# Altium PCB SensorFimPapel.PcbDoc
Units mm, origin at the board's own origin, x right, y up, seen from the top; angles counter-clockwise.
Board outline 50 x 25 mm, 2 copper layers (Top Layer, Bottom Layer), stack 1.671 mm thick; 15 components, 5 nets, 25 pads, 4 vias.
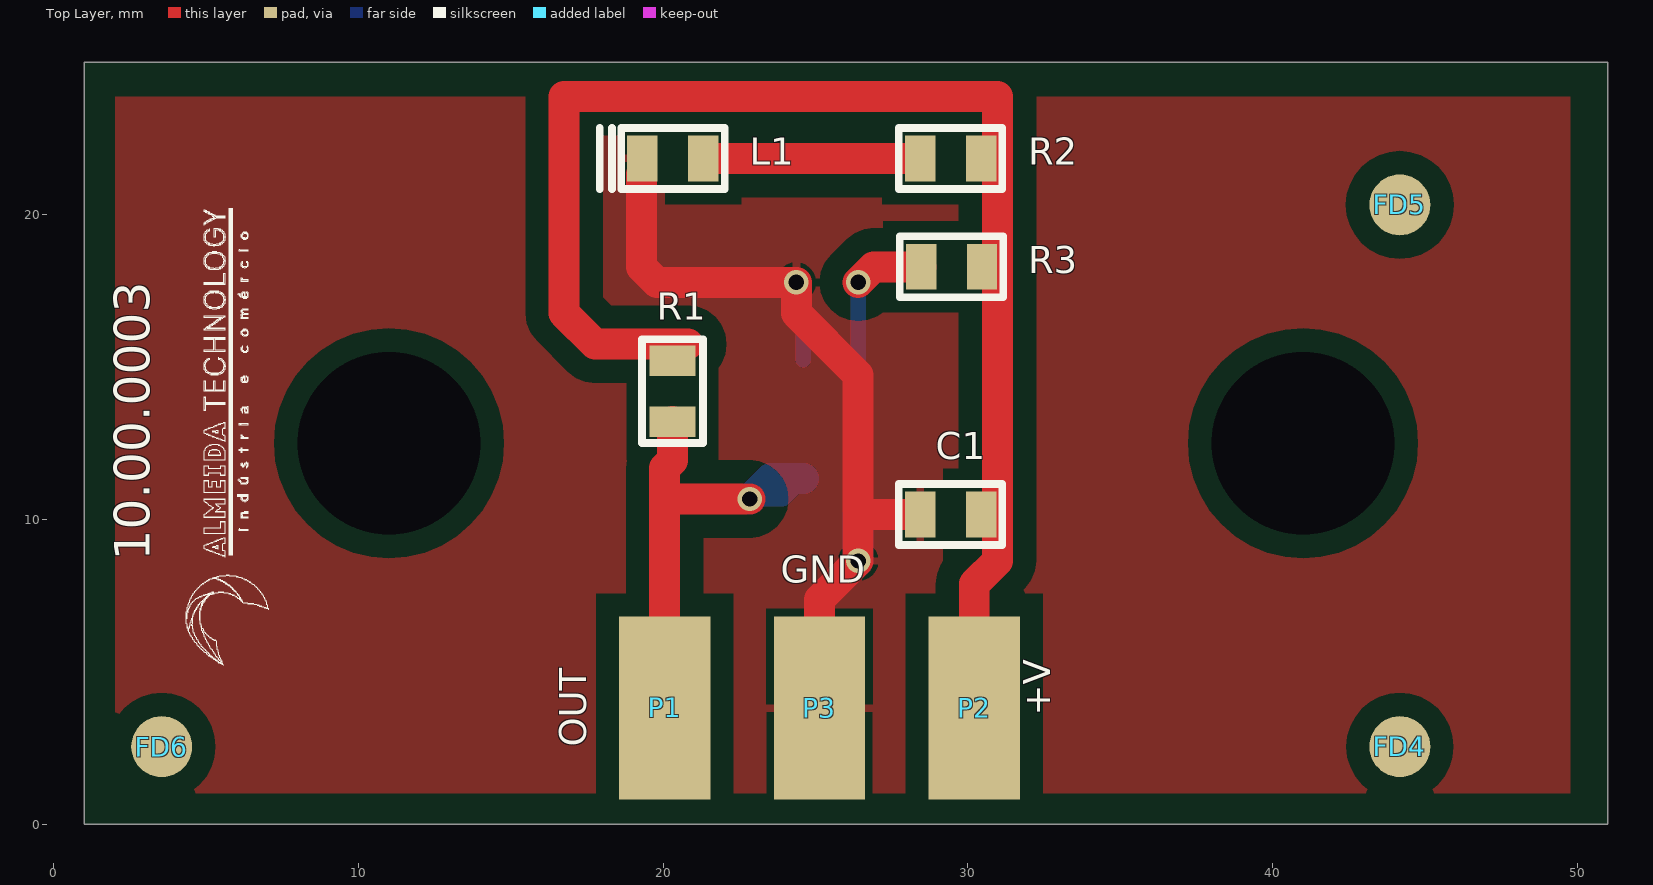
[diagram p0: Top Layer view]
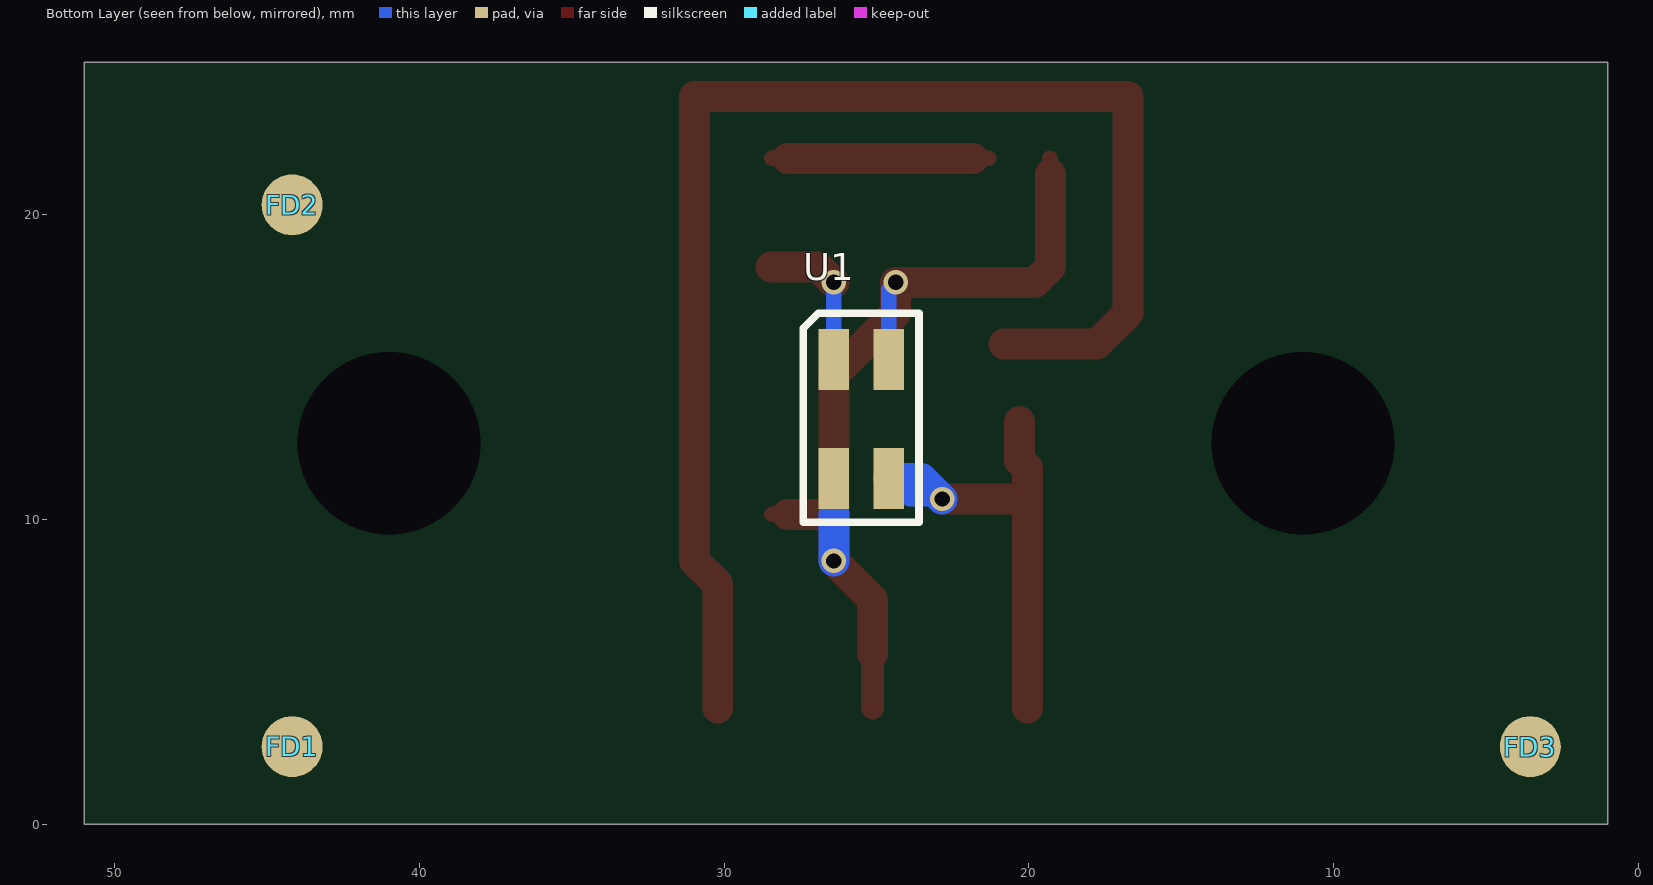
[diagram p1: Bottom Layer view, seen from below]
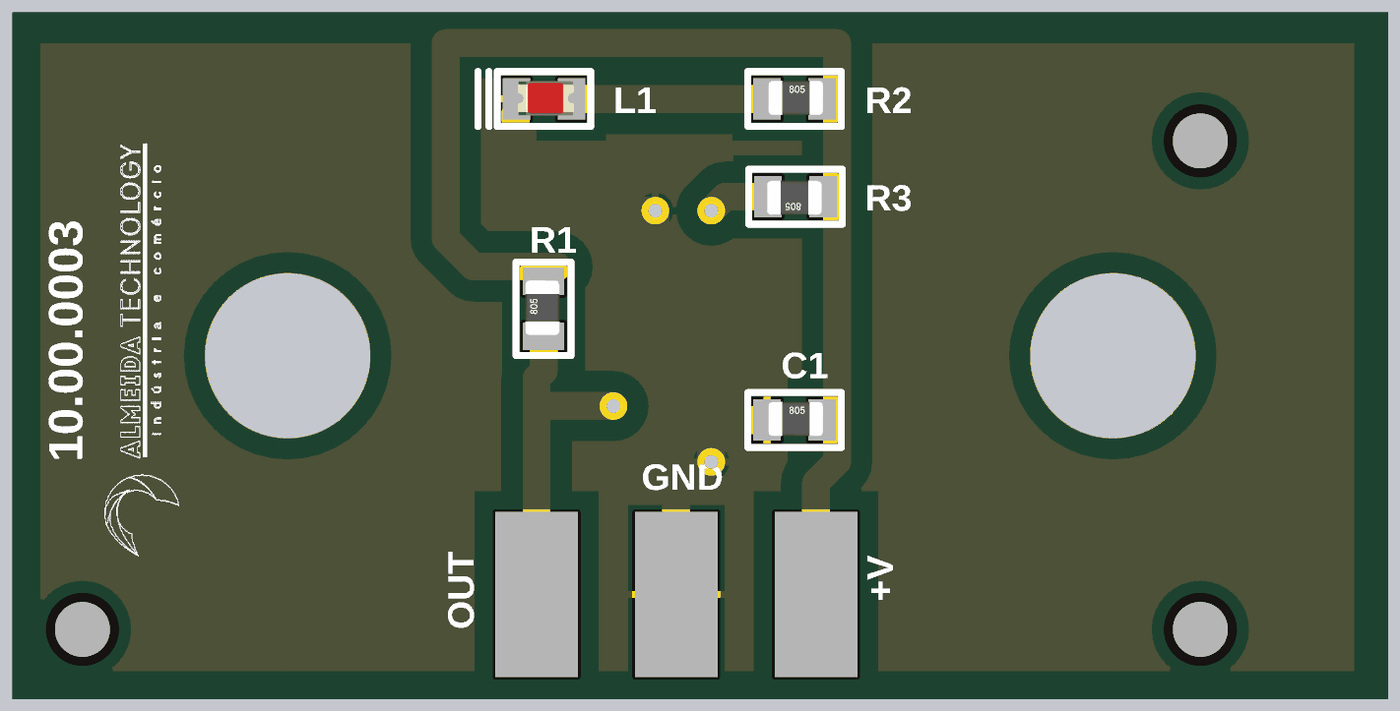
[diagram p2: 3D render of the assembled board from above, using the file's embedded part models]

## Layer stack, top to bottom
Top Solder: solder mask 0.0102, Solder Resist, Dk 3.5
Top Layer: signal copper 0.0356
Dielectric 1: dielectric 1.6, FR-4, Dk 4.8
Bottom Layer: signal copper 0.0356
Bottom Solder: solder mask 0.0102, Solder Resist, Dk 3.5

## Board outline
1,0 51,0 51,25 1,25

## Design rules (kind name [scope] priority, off if disabled: settings)
Clearance [All] p1: gap=0.762
PolygonConnect [All] p1: connectstyle=Relief reliefconductorwidth=0.254 reliefentries=4 polygonreliefangle="90 Angle" airgapwidth=0.254
RoutingVias [All] p1: holewidth=0.711 width=1.27 viastyle="Through Hole" minholewidth=0.711 minwidth=1.27 maxholewidth=0.711 maxwidth=1.27
SolderMaskExpansion [All] p1: expansion=0.102
UnpouredPolygon [All] p1: allowunpoured=FALSE
Width [All] p1: maxlimit=2.54 minlimit=0.254 preferedwidth=0.508
29 further rules are at their usual default settings.

## Components (designator, comment, footprint, x,y, rotation, side; value= is the part's Value field where it differs from the comment)
C1 "100nF/50-0805-NPO" "0805-REVISADO ONDA" 28.432,10.16 r0 top
FD1 "FID" FIDUCIAL 44.18,2.54 r180 bottom
FD2 "FID" FIDUCIAL 44.18,20.32 r180 bottom
FD3 "FID" FIDUCIAL 3.54,2.54 r180 bottom
FD4 "FID" FIDUCIAL 44.18,2.54 r0 top
FD5 "FID" FIDUCIAL 44.18,20.32 r0 top
FD6 "FID" FIDUCIAL 3.54,2.54 r0 top
L1 "LED VERDE 5mm" "LED 0805 - REVISADO ONDA" 21.32,21.844 r180 top
P1 "PAD" "PAD 3,5" 20.05,3.81 r0 top
P2 "PAD" "PAD 3,5" 30.21,3.81 r0 top
P3 "PAD" "PAD 3,5" 25.13,3.81 r0 top
R1 "100K-0805-5%" "0805-REVISADO ONDA" 20.304,13.208 r90 top
R2 "1K-0805-5%" "0805-REVISADO ONDA" 28.432,21.844 r0 top
R3 "100R-0805-5%" "0805-REVISADO ONDA" 30.464,18.288 r180 top
U1 "QRE1113GR" QR1113 26.4,15.24 r270 bottom

## Footprints (in the part's own frame and the unit in brackets; to place one, negate y for a bottom-side part, rotate by r counter-clockwise, add the part's x,y. Pads: shape width x height; smd on the part's side, far side on the other; paste and mask are expansions set on the pad)
"0805-REVISADO ONDA" [mm]
  rect 1x1.5 smd: 1(0,0) 2(2,0)
  silkscreen extent -0.7,-1 2.7,1, body extent 0.04,-0.58 2.04,0.67, height 0.78
FIDUCIAL [mm]
  round 2 smd: 1(0,0)
"LED 0805 - REVISADO ONDA" [mm]
  rect 1x1.5 smd: 1(0,0) 2(2,0)
  silkscreen extent -0.7,-1 3.4,1, body extent -0.07,-0.65 1.95,0.6, height 1.1
"PAD 3,5" [mm]
  rect 3x6 smd: 1(0,0)
QR1113 [mm]
  rect 2x1 smd: 1(0,0) 2(3.9,0) 3(3.9,1.8) 4(0,1.8)
  silkscreen extent -1.52,-1 5.33,2.79

## Part data
FD1 FD2 FD3 FD4 FD5 FD6: library part FIDUCIAL

## Free pads (board coordinates)
  round 0 hole 6: ""(11,12.5) ""(41,12.5)

## Via types
v1: diameter 0.8, hole 0.5, Top Layer to Bottom Layer, 4 vias

## Nets (pads, with @x,y where several pads share a name; then routed paths per layer and width w, separated by ;. In a path a pad name is that pad's centre, name@x,y a point inside that pad or via, vN(x,y) a via of type N, cw(c..) or ccw(c..) an arc to the next point about the centre after c; other vN are vias at no path point)
GND: C1.1 L1.2 P3.1 U1.2 U1.4 | length 31.6
  Top Layer w0.508: L1.2@19.288,21.336 19.288,21.812 L1.2 ; 27.924,10.16 C1.1
  Top Layer w0.762: P3.1 P3.1@25.13,5.588
  Top Layer w1.016: L1.2@19.288,21.336 19.288,18.288 19.796,17.78 v1(24.368,17.78) 24.368,16.764 26.4,14.732 26.4,10.16 ; P3.1@25.13,5.588 25.13,7.366 v1(26.4,8.636) 26.4,10.16 ; 27.924,10.16 26.4,10.16
  Bottom Layer w0.508: v1(24.368,17.78) 24.6,17.548 U1.4 ; 26.4,10.16 U1.2
  Bottom Layer w1.016: v1(26.4,8.636) 26.4,10.16
NetC1_2: C1.2 P2.1 R1.2 R2.2 R3.1 | length 46.2
  Top Layer w1.016: 20.812,15.748 17.764,15.748 16.748,16.764 16.748,23.876 30.972,23.876 30.972,8.636 30.21,7.874 P2.1
NetL1_1: L1.1 R2.1 | length 7.1
  Top Layer w0.508: L1.1 21.828,21.844 ; 27.924,21.844 R2.1
  Top Layer w1.016: 21.828,21.844 27.924,21.844
NetP1_1: P1.1 R1.1 U1.3 | length 23.3
  Top Layer w0.508: P1.1 20.304,4.064 20.304,10.668 20.177,10.795
  Top Layer w1.016: P1.1 20.05,11.684 20.304,11.938 R1.1 ; 20.304,10.668 v1(22.844,10.668)
  Bottom Layer w0.508: v1(22.844,10.668) 23.928,10.668 U1.3
  Bottom Layer w1.016: v1(22.844,10.668) 23.516,11.34 U1.3
NetR3_2: R3.2 U1.1 | length 4.8
  Top Layer w1.016: v1(26.4,17.78) 26.908,18.288 R3.2
  Bottom Layer w0.508: U1.1 v1(26.4,17.78)
pads on no net: FD1.1 FD2.1 FD3.1 FD4.1 FD5.1 FD6.1

## Polygon pours and split planes (outlines as drawn)
GND on Top Layer "Top Layer-No Net" (solid, pour order 2): 2.016,1.016 2.016,23.876 49.768,23.876 49.768,1.016

## Silkscreen, mask and mechanical layers (free items; w line width, h text height)
Top Overlay:
  drawing of 2125 lines, arcs and shapes, not listed
  text "10.00.0003" at 3.54,8.636 h2 r90
  text "GND" at 23.86,7.62 h1.52
  text "+V" at 33.004,3.556 h1.52 r90
  text "OUT" at 17.764,2.54 h1.52 r90
Mechanical 1:
  lines w0.254: 0,0 1,0 ; 1,0 1,25 51,25 51,0 1,0